# EAGLE board button_fingersX10 (EAGLE 7.6.0)
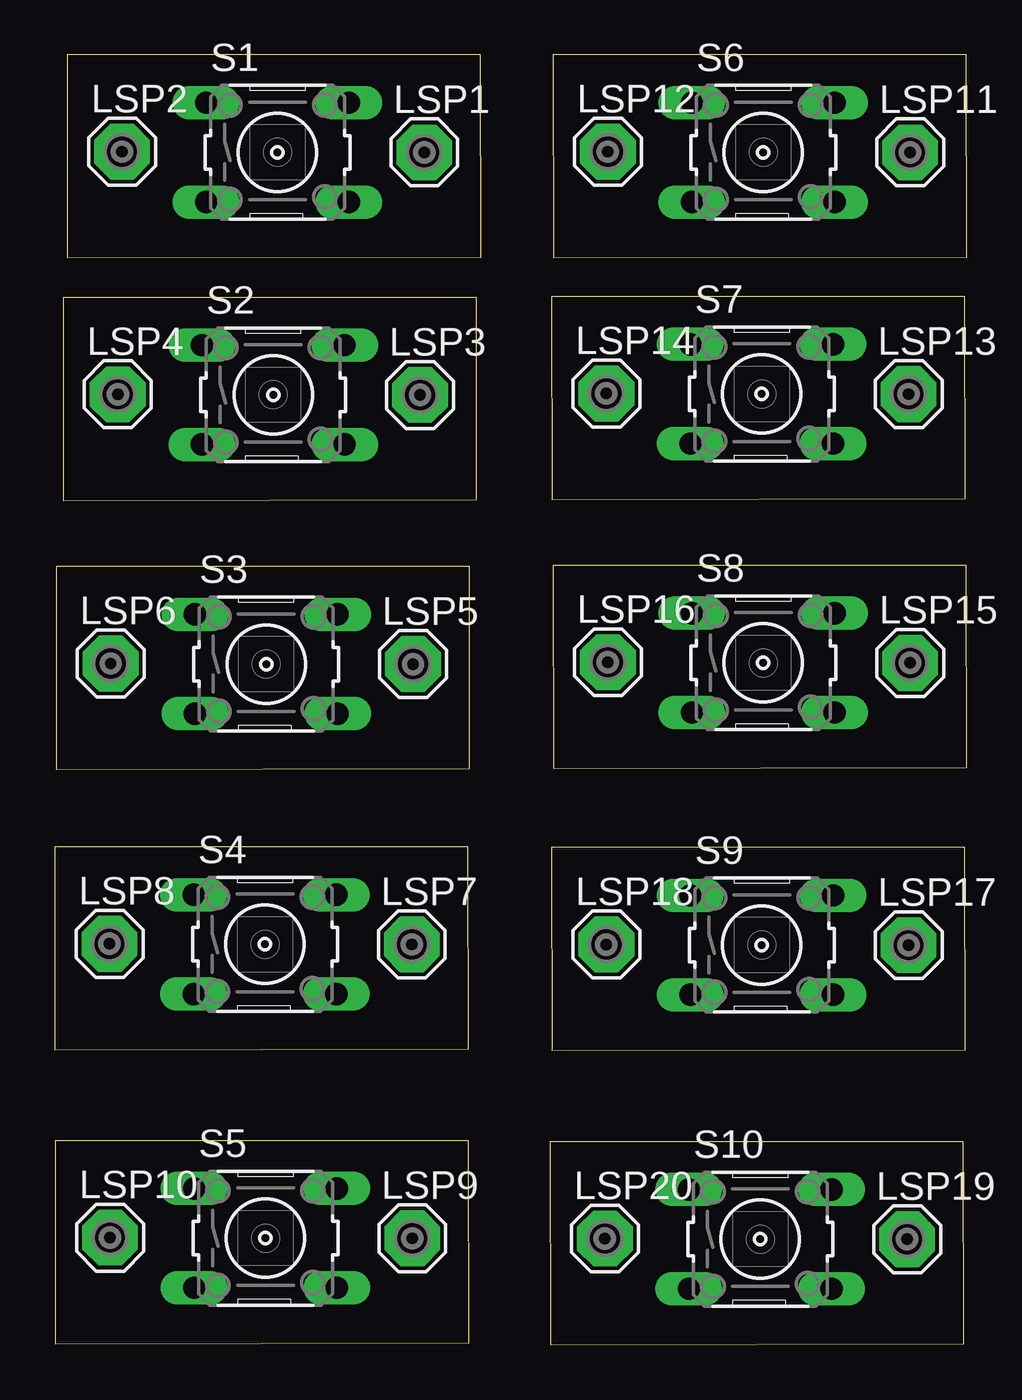
[diagram p0: board, top side]
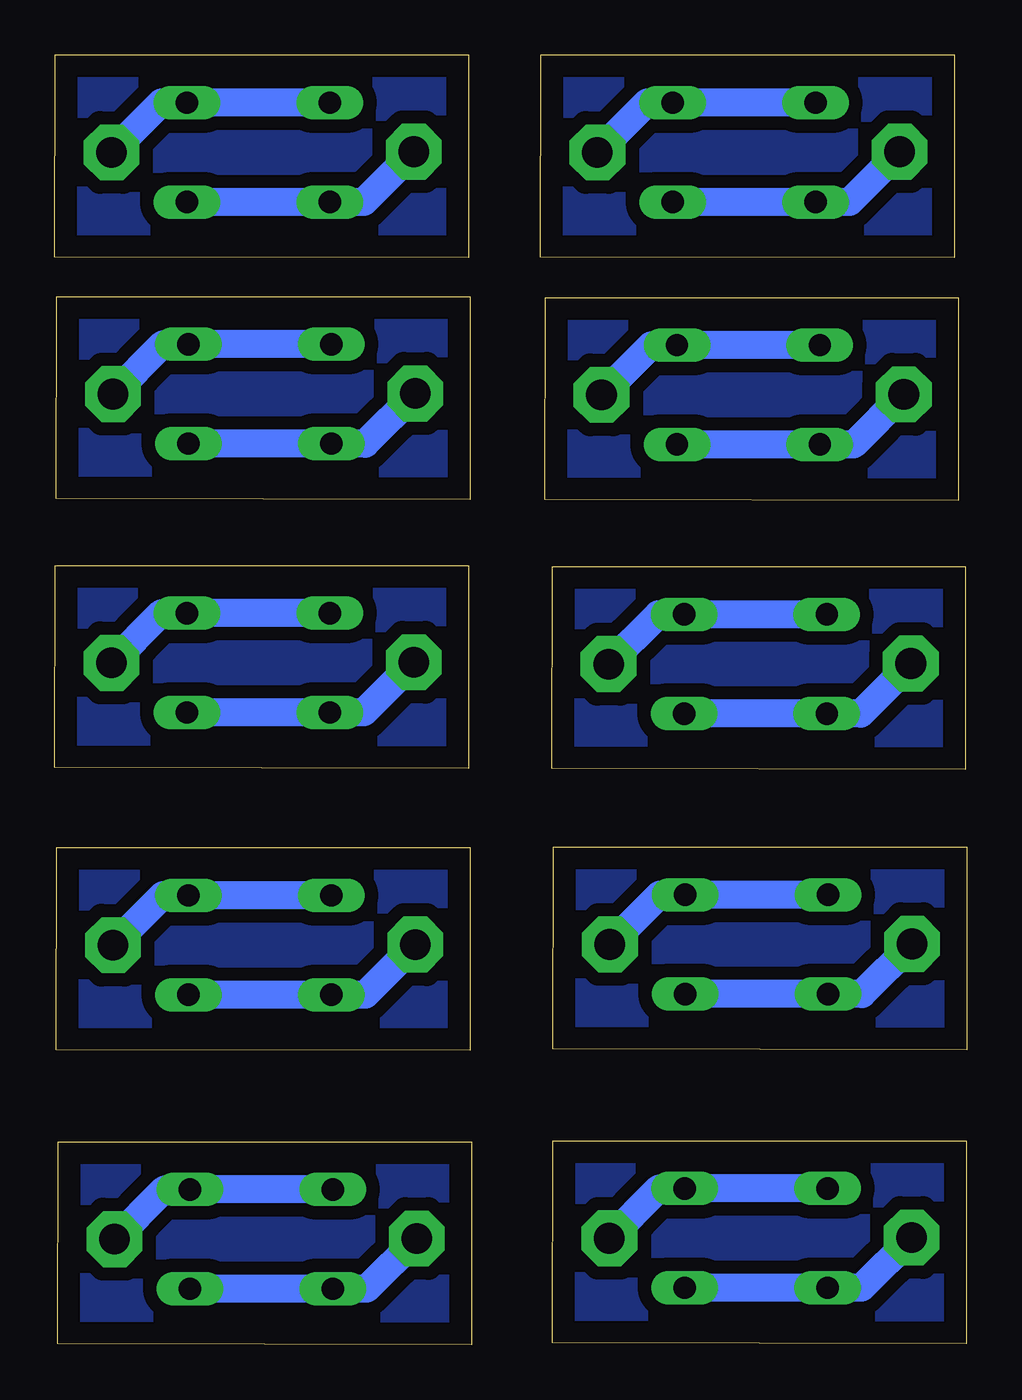
[diagram p1: board, bottom side, seen from below]

Size 41.52 x 58.72 mm. Coordinates in mm from the lower left corner, seen from the top.
Outline: 0.57,49.48 19.4,49.52 19.38,58.72 0.57,58.72 0.57,49.48
Outline: 0.38,38.44 19.21,38.48 19.19,47.67 0.38,47.67 0.38,38.44
Outline: 0.06,26.18 18.89,26.22 18.87,35.42 0.06,35.42 0.06,26.18
Outline: 0,13.42 18.83,13.46 18.81,22.66 0,22.66 0,13.42
Outline: 0.02,0.04 18.85,0.08 18.83,9.28 0.02,9.28 0.02,0.04
Outline: 22.69,49.48 41.52,49.52 41.5,58.72 22.69,58.72 22.69,49.48
Outline: 22.62,38.47 41.45,38.51 41.43,47.71 22.62,47.71 22.62,38.47
Outline: 22.69,26.24 41.52,26.28 41.5,35.47 22.69,35.48 22.69,26.24
Outline: 22.62,13.39 41.45,13.43 41.43,22.62 22.62,22.62 22.62,13.39
Outline: 22.55,0 41.38,0.04 41.37,9.24 22.55,9.24 22.55,0
Copper layers (1*16): Top 0.035mm / dielectric 1.5mm / Bottom 0.035mm
Design rules "default": minimum track width 10mil, minimum drill 24mil, track to track 8mil, track to pad 8mil, pad to pad 8mil, via to via 8mil, smd to smd 8mil, copper to edge 40mil, drill to drill 8mil, minimum pad ring 10mil, minimum via ring 8mil, stop-mask expansion 4mil, vias tented up to drill 0mil, thermal gap 10mil

## Footprints (pad centres in the part's own frame; a part is rotated, then mirrored left to right if it is on the bottom)
SE14 = drill 1.397 pad 2.54 octagon: MP 0,0
B3F-10XX = drill 1.016 long: 1 -3.251,2.261; 2 3.251,2.261; 3 -3.251,-2.261; 4 3.251,-2.261

## Placement (x,y rotation side)
LSP1  SE14  [SE14]  16.82,54.28 0 top
LSP2  SE14  [SE14]  3.06,54.31 0 top
LSP3  SE14  [SE14]  16.63,43.24 0 top
LSP4  SE14  [SE14]  2.86,43.26 0 top
LSP5  SE14  [SE14]  16.31,30.98 0 top
LSP6  SE14  [SE14]  2.54,31.01 0 top
LSP7  SE14  [SE14]  16.25,18.22 0 top
LSP8  SE14  [SE14]  2.49,18.25 0 top
LSP9  SE14  [SE14]  16.27,4.84 0 top
LSP10  SE14  [SE14]  2.51,4.87 0 top
LSP11  SE14  [SE14]  38.94,54.28 0 top
LSP12  SE14  [SE14]  25.18,54.31 0 top
LSP13  SE14  [SE14]  38.87,43.27 0 top
LSP14  SE14  [SE14]  25.11,43.3 0 top
LSP15  SE14  [SE14]  38.94,31.04 0 top
LSP16  SE14  [SE14]  25.18,31.07 0 top
LSP17  SE14  [SE14]  38.87,18.19 0 top
LSP18  SE14  [SE14]  25.11,18.21 0 top
LSP19  SE14  [SE14]  38.81,4.8 0 top
LSP20  SE14  [SE14]  25.04,4.83 0 top
S1  [B3F-10XX]  10.13,54.28 0 top
S2  [B3F-10XX]  9.94,43.24 0 top
S3  [B3F-10XX]  9.62,30.98 0 top
S4  [B3F-10XX]  9.57,18.22 0 top
S5  [B3F-10XX]  9.59,4.85 0 top
S6  [B3F-10XX]  32.26,54.28 0 top
S7  [B3F-10XX]  32.19,43.28 0 top
S8  [B3F-10XX]  32.26,31.04 0 top
S9  [B3F-10XX]  32.19,18.19 0 top
S10  [B3F-10XX]  32.12,4.8 0 top

## Library data of the parts
LSP1-LSP20 = solpad
S1-S10 = switch-omron; MPN: B3F-1000; OC_FARNELL: 176432; OC_NEWARK: 36M3542

## Nets
N$1: LSP1.MP S1.1 S1.2
N$2: LSP2.MP S1.3 S1.4
N$4: LSP3.MP S2.1 S2.2
N$5: LSP4.MP S2.3 S2.4
N$7: LSP5.MP S3.1 S3.2
N$8: LSP6.MP S3.3 S3.4
N$10: LSP7.MP S4.1 S4.2
N$11: LSP8.MP S4.3 S4.4
N$13: LSP9.MP S5.1 S5.2
N$14: LSP10.MP S5.3 S5.4
N$16: LSP11.MP S6.1 S6.2
N$17: LSP12.MP S6.3 S6.4
N$19: LSP13.MP S7.1 S7.2
N$20: LSP14.MP S7.3 S7.4
N$22: LSP15.MP S8.1 S8.2
N$23: LSP16.MP S8.3 S8.4
N$25: LSP17.MP S9.1 S9.2
N$26: LSP18.MP S9.3 S9.4
N$28: LSP19.MP S10.1 S10.2
N$29: LSP20.MP S10.3 S10.4

## Tracks (layer width: path | path; a pad name or v marks a point on that pad's centre or on a via)
N$1
  Bottom 1.27: S1.1 S1.2 14.55,56.54 LSP1.MP
N$2
  Bottom 1.27: S1.4 S1.3 5.34,52.02 LSP2.MP
N$3
  pour Bottom (isolate 0.61): 0.57,49.48 0.57,58.75 1.2,59.39 19.22,59.37 20.14,58.45 20.14,49.72 19.24,48.83 1.21,48.84
N$4
  Bottom 1.27: S2.1 S2.2 14.36,45.5 LSP3.MP
N$5
  Bottom 1.27: S2.4 S2.3 5.15,40.98 LSP4.MP
N$6
  pour Bottom (isolate 0.61): 0.38,38.44 0.38,47.71 1.01,48.35 19.03,48.33 19.95,47.41 19.95,38.68 19.05,37.78 1.02,37.8
N$7
  Bottom 1.27: S3.1 S3.2 14.04,33.25 LSP5.MP
N$8
  Bottom 1.27: S3.4 S3.3 4.83,28.72 LSP6.MP
N$9
  pour Bottom (isolate 0.61): 0.06,26.19 0.06,35.45 0.69,36.09 18.71,36.07 19.63,35.15 19.63,26.42 18.73,25.53 0.7,25.55
N$10
  Bottom 1.27: S4.1 S4.2 13.99,20.48 LSP7.MP
N$11
  Bottom 1.27: S4.4 S4.3 4.77,15.96 LSP8.MP
N$12
  pour Bottom (isolate 0.61): 0,13.42 0,22.69 0.64,23.33 18.65,23.31 19.57,22.39 19.57,13.66 18.67,12.77 0.64,12.78
N$13
  Bottom 1.27: S5.1 S5.2 14.01,7.11 LSP9.MP
N$14
  Bottom 1.27: S5.4 S5.3 4.79,2.59 LSP10.MP
N$15
  pour Bottom (isolate 0.61): 0.02,0.05 0.02,9.32 0.66,9.95 18.67,9.93 19.59,9.01 19.59,0.28 18.7,-0.61 0.66,-0.59
N$16
  Bottom 1.27: S6.1 S6.2 36.68,56.54 LSP11.MP
N$17
  Bottom 1.27: S6.4 S6.3 27.46,52.02 LSP12.MP
N$18
  pour Bottom (isolate 0.61): 22.69,49.48 22.69,58.75 23.33,59.39 41.34,59.37 42.26,58.45 42.26,49.72 41.37,48.83 23.33,48.84
N$19
  Bottom 1.27: S7.1 S7.2 36.61,45.54 LSP13.MP
N$20
  Bottom 1.27: S7.4 S7.3 27.39,41.02 LSP14.MP
N$21
  pour Bottom (isolate 0.61): 22.62,38.48 22.62,47.75 23.26,48.38 41.27,48.36 42.19,47.44 42.19,38.71 41.3,37.82 23.26,37.84
N$22
  Bottom 1.27: S8.1 S8.2 36.68,33.3 LSP15.MP
N$23
  Bottom 1.27: S8.4 S8.3 27.46,28.78 LSP16.MP
N$24
  pour Bottom (isolate 0.61): 22.69,26.24 22.69,35.51 23.33,36.15 41.34,36.13 42.26,35.21 42.26,26.48 41.37,25.58 23.33,25.6
N$25
  Bottom 1.27: S9.1 S9.2 36.61,20.45 LSP17.MP
N$26
  Bottom 1.27: S9.4 S9.3 27.39,15.93 LSP18.MP
N$27
  pour Bottom (isolate 0.61): 22.62,13.39 22.62,22.66 23.26,23.3 41.27,23.28 42.19,22.36 42.19,13.63 41.3,12.73 23.26,12.75
N$28
  Bottom 1.27: S10.1 S10.2 36.54,7.06 LSP19.MP
N$29
  Bottom 1.27: S10.4 S10.3 27.32,2.54 LSP20.MP
N$30
  pour Bottom (isolate 0.61): 22.55,0 22.55,9.27 23.19,9.91 41.2,9.89 42.12,8.97 42.12,0.24 41.23,-0.65 23.19,-0.64